# Altium PCB CV2018_LED.PcbDoc
Units mm, origin at the board's own origin, x right, y up, seen from the top; angles counter-clockwise.
Board outline 49.76 x 100 mm, 2 copper layers (TopLayer, BottomLayer); 44 components, 128 nets, 230 pads, 29 vias.
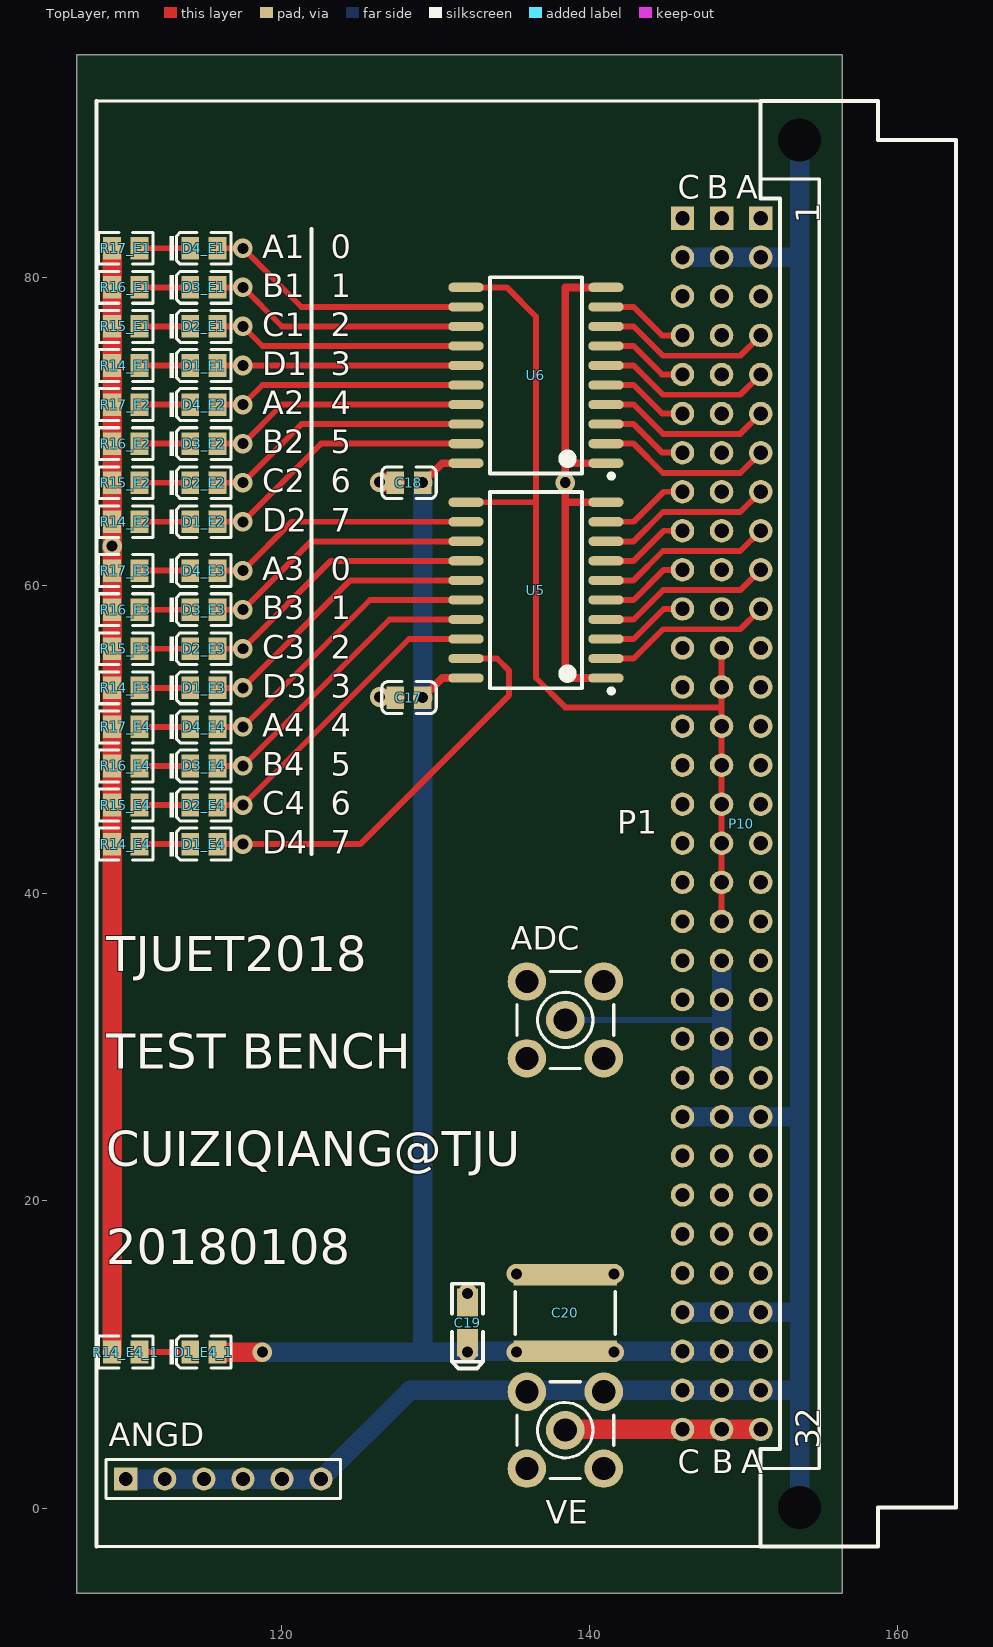
[diagram p0: TopLayer view]
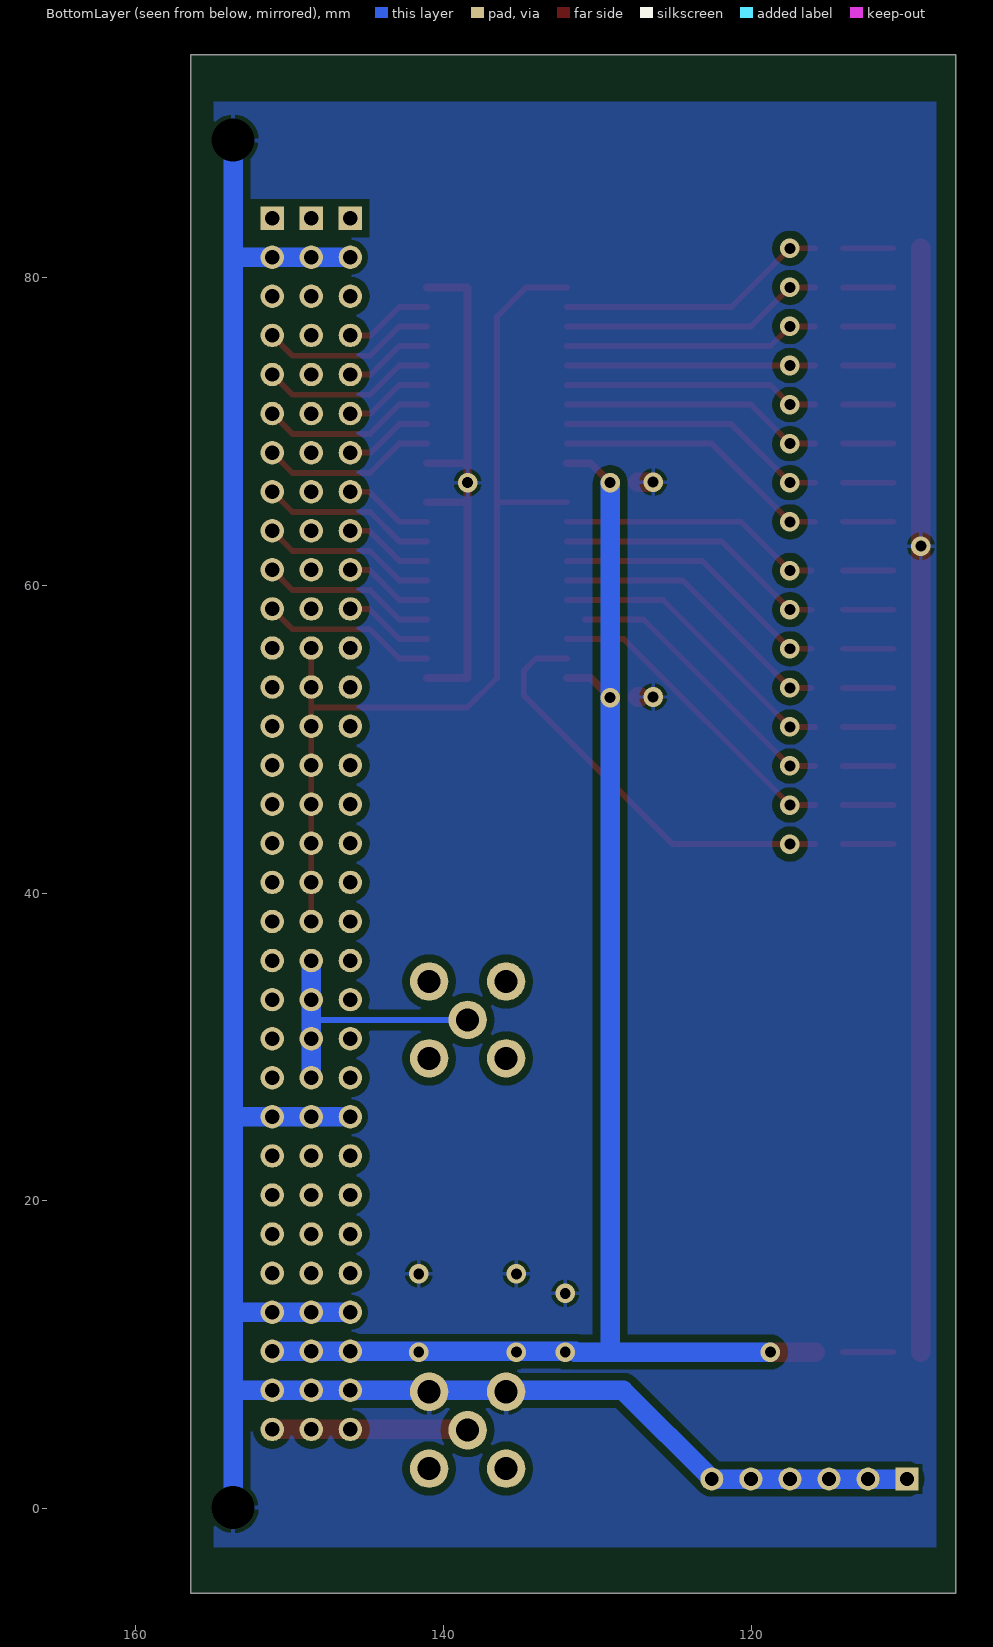
[diagram p1: BottomLayer view, seen from below]
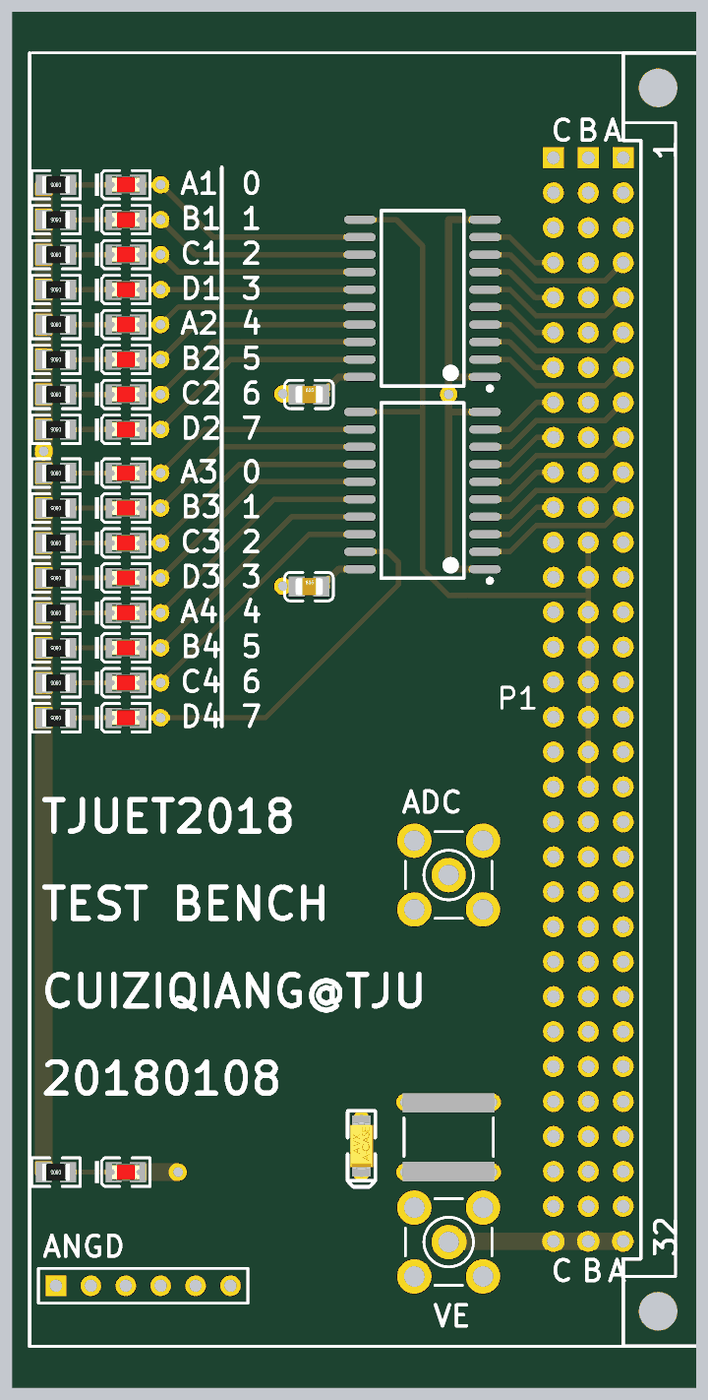
[diagram p2: 3D render of the assembled board from above, using the file's embedded part models]

## Layer stack, top to bottom
TopSolder: solder mask 0.0102, Solder Resist, Dk 3.5
TopLayer: signal copper 0.0356
Dielectric1: core 0.32, FR-4, Dk 4.8
BottomLayer: signal copper 0.0356
BottomSolder: solder mask 0.0102, Solder Resist, Dk 3.5

## Board outline
106.68,-5.512 106.68,94.488 156.439,94.488 156.439,-5.512

## Design rules (kind name [scope] priority, off if disabled: settings)
Clearance [All] p1: gap=0.254
FabricationTestPointUsage TestPointUsage [All] p1: valid=0 allowmultiple=FALSE
FabricationTestpoint Testpoint [All] p1: side=3 testpointundercomponent=TRUE minsize=1.016 maxsize=2.54 preferedsize=1.524 minholesize=0.508 maxholesize=1.016 preferedholesize=0.813 testpointgrid=0.025 allowsidetop=TRUE allowsidebottom=TRUE usegrid=TRUE gridtolerance=0
PlaneClearance [All] p1: clearance=0.254
PolygonConnect [All] p1: connectstyle=Relief reliefconductorwidth=0.254 reliefentries=4 polygonreliefangle="90 Angle" airgapwidth=0.254
RoutingVias [All] p1: holewidth=0.711 width=1.27 viastyle="Through Hole" minholewidth=0.711 minwidth=1.27 maxholewidth=0.711 maxwidth=1.27
SilkToSolderMaskClearance SilkscreenOverComponentPads [IsPad] p1: minsilkscreentomaskgap=0.254 clearancetoexposedcopper=TRUE
SolderMaskExpansion [All] p1: expansion=0.051
Width [All] p1: maxlimit=2.54 minlimit=0.254 preferedwidth=0.381
25 further rules are at their usual default settings.

## Classes and differential pairs
channel class CVx1: E1 E2 E3 E4
net class SWD[1..4]: SWD1 SWD2 SWD3 SWD4
net class SWC[1..4]: SWC1 SWC2 SWC3 SWC4
net class SWB[1..4]: SWB1 SWB2 SWB3 SWB4
net class SWA[1..4]: SWA1 SWA2 SWA3 SWA4
component class E4: D1_E4 D2_E4 D3_E4 D4_E4 R12_E4 R14_E4 R15_E4 R16_E4 R17_E4
component class E3: C1_E3 C2_E3 C3_E3 D1_E3 D2_E3 D3_E3 D4_E3 R2_E3 R6_E3 R12_E3 R14_E3 R15_E3 R16_E3 R17_E3
component class E2: C1_E2 C2_E2 C3_E2 D1_E2 D2_E2 D3_E2 D4_E2 R2_E2 R6_E2 R12_E2 R14_E2 R15_E2 R16_E2 R17_E2
component class E1: C1 C2 C3 C4 C5 C6 C7 C8 C9 C10 C12 C13 D1_E1 D2_E1 D3_E1 D4_E1 R1 R2 R3 R4 R5 R6 R7 R8 R9 R10 R11 R12 R14_E1 R15_E1 R16_E1 R17_E1 U4
component class CVTOP: C17 C18 C19 C20 P10 U5 U6

## Components (designator, comment, footprint, x,y, rotation, side; value= is the part's Value field where it differs from the comment)
ADC "Comment" SMB_V-RJ45 138.43,31.75 r0 top
ANGD "Comment" HDR1X6 109.855,1.905 r0 top
C17 "100nF(104) 10% 50V" LC-0805_C 128.27,52.705 r0 top
C18 "100nF(104) 10% 50V" LC-0805_C 128.27,66.675 r0 top
C19 "10uF (106) ±10% 16V" LC-CASE-A_3216 132.08,12.065 r270 top
C20 "Cap Pol3" C2225 138.43,12.7 r90 top
D1_E1 "红灯 0805" LC-0805_LED_S1 114.935,74.295 r0 top (schematic designator D1)
D1_E2 "红灯 0805" LC-0805_LED_S1 114.935,64.135 r0 top (schematic designator D1)
D1_E3 "红灯 0805" LC-0805_LED_S1 114.935,53.34 r0 top (schematic designator D1)
D1_E4 "红灯 0805" LC-0805_LED_S1 114.935,43.18 r0 top (schematic designator D1)
D1_E4_1 "红灯 0805" LC-0805_LED_S1 114.935,10.16 r0 top (schematic designator D1)
D2_E1 "红灯 0805" LC-0805_LED_S1 114.935,76.835 r0 top (schematic designator D2)
D2_E2 "红灯 0805" LC-0805_LED_S1 114.935,66.675 r0 top (schematic designator D2)
D2_E3 "红灯 0805" LC-0805_LED_S1 114.935,55.88 r0 top (schematic designator D2)
D2_E4 "红灯 0805" LC-0805_LED_S1 114.935,45.72 r0 top (schematic designator D2)
D3_E1 "红灯 0805" LC-0805_LED_S1 114.935,79.375 r0 top (schematic designator D3)
D3_E2 "红灯 0805" LC-0805_LED_S1 114.935,69.215 r0 top (schematic designator D3)
D3_E3 "红灯 0805" LC-0805_LED_S1 114.935,58.42 r0 top (schematic designator D3)
D3_E4 "红灯 0805" LC-0805_LED_S1 114.935,48.26 r0 top (schematic designator D3)
D4_E1 "红灯 0805" LC-0805_LED_S1 114.935,81.915 r0 top (schematic designator D4)
D4_E2 "红灯 0805" LC-0805_LED_S1 114.935,71.755 r0 top (schematic designator D4)
D4_E3 "红灯 0805" LC-0805_LED_S1 114.935,60.96 r0 top (schematic designator D4)
D4_E4 "红灯 0805" LC-0805_LED_S1 114.935,50.8 r0 top (schematic designator D4)
P10 "CNVME96" CNVME96 151.13,83.871 r90 top
R14_E1 "1KΩ (1001) ±1%" LC-0805_R 109.855,74.295 r180 top (schematic designator R14)
R14_E2 "1KΩ (1001) ±1%" LC-0805_R 109.855,64.135 r180 top (schematic designator R14)
R14_E3 "1KΩ (1001) ±1%" LC-0805_R 109.855,53.34 r180 top (schematic designator R14)
R14_E4 "1KΩ (1001) ±1%" LC-0805_R 109.855,43.18 r180 top (schematic designator R14)
R14_E4_1 "1KΩ (1001) ±1%" LC-0805_R 109.855,10.16 r180 top (schematic designator R14)
R15_E1 "1KΩ (1001) ±1%" LC-0805_R 109.855,76.835 r180 top (schematic designator R15)
R15_E2 "1KΩ (1001) ±1%" LC-0805_R 109.855,66.675 r180 top (schematic designator R15)
R15_E3 "1KΩ (1001) ±1%" LC-0805_R 109.855,55.88 r180 top (schematic designator R15)
R15_E4 "1KΩ (1001) ±1%" LC-0805_R 109.855,45.72 r180 top (schematic designator R15)
R16_E1 "1KΩ (1001) ±1%" LC-0805_R 109.855,79.375 r180 top (schematic designator R16)
R16_E2 "1KΩ (1001) ±1%" LC-0805_R 109.855,69.215 r180 top (schematic designator R16)
R16_E3 "1KΩ (1001) ±1%" LC-0805_R 109.855,58.42 r180 top (schematic designator R16)
R16_E4 "1KΩ (1001) ±1%" LC-0805_R 109.855,48.26 r180 top (schematic designator R16)
R17_E1 "1KΩ (1001) ±1%" LC-0805_R 109.855,81.915 r180 top (schematic designator R17)
R17_E2 "1KΩ (1001) ±1%" LC-0805_R 109.855,71.755 r180 top (schematic designator R17)
R17_E3 "1KΩ (1001) ±1%" LC-0805_R 109.855,60.96 r180 top (schematic designator R17)
R17_E4 "1KΩ (1001) ±1%" LC-0805_R 109.855,50.8 r180 top (schematic designator R17)
U5 "74HC573D" LC-SOIC-20_300mil 136.525,59.69 r90 top
U6 "74HC573D" LC-SOIC-20_300mil 136.525,73.66 r90 top
VE "Comment" SMB_V-RJ45 138.43,5.08 r0 top

## Footprints (in the part's own frame and the unit in brackets; to place one, negate y for a bottom-side part, rotate by r counter-clockwise, add the part's x,y. Pads: shape width x height; smd on the part's side, far side on the other; paste and mask are expansions set on the pad)
C2225 [mm] "Chip Capacitor, Body 5.7x6.4mm, IPC High Density"
  rect 1.4x6.7 smd: 1(-2.5,0) 2(2.5,0)
  silkscreen extent -1.4,-3.25 1.4,3.25, body extent -2.95,-3.4 2.95,3.4, height 1.4
CNVME96 [mil]
  round 50 hole 110: 97(200,-100) 98(-3300,-100)
  rect 60x60 / inner round 60 / far side rect 60x60 hole 37: A1(0,0) B1(0,100) C1(0,200)
  round 60 hole 37: A2(-100,0) A3(-200,0) A4(-300,0) A5(-400,0) A6(-500,0) A7(-600,0) A8(-700,0) A9(-800,0) A10(-900,0) A11(-1000,0) A12(-1100,0) A13(-1200,0) A14(-1300,0) A15(-1400,0) A16(-1500,0) A17(-1600,0) A18(-1700,0) A19(-1800,0) A20(-1900,0) A21(-2000,0) A22(-2100,0) A23(-2200,0) A24(-2300,0) A25(-2400,0) A26(-2500,0) A27(-2600,0) A28(-2700,0) A29(-2800,0) A30(-2900,0) A31(-3000,0) A32(-3100,0) B2(-100,100) B3(-200,100) B4(-300,100) B5(-400,100) B6(-500,100) B7(-600,100) B8(-700,100) B9(-800,100) B10(-900,100) B11(-1000,100) B12(-1100,100) B13(-1200,100) B14(-1300,100) B15(-1400,100) B16(-1500,100) B17(-1600,100) B18(-1700,100) B19(-1800,100) B20(-1900,100) B21(-2000,100) B22(-2100,100) B23(-2200,100) B24(-2300,100) B25(-2400,100) B26(-2500,100) B27(-2600,100) B28(-2700,100) B29(-2800,100) B30(-2900,100) B31(-3000,100) B32(-3100,100) C2(-100,200) C3(-200,200) C4(-300,200) C5(-400,200) C6(-500,200) C7(-600,200) C8(-700,200) C9(-800,200) C10(-900,200) C11(-1000,200) C12(-1100,200) C13(-1200,200) C14(-1300,200) C15(-1400,200) C16(-1500,200) C17(-1600,200) C18(-1700,200) C19(-1800,200) C20(-1900,200) C21(-2000,200) C22(-2100,200) C23(-2200,200) C24(-2300,200) C25(-2400,200) C26(-2500,200) C27(-2600,200) C28(-2700,200) C29(-2800,200) C30(-2900,200) C31(-3000,200) C32(-3100,200)
  silkscreen extent -3400,-500 300,0
HDR1X6 [mm] "Connector; Header; 6 Position"
  rect 1.5x1.5 hole 0.9: 1(0,0)
  round 1.5 hole 0.9: 2(2.54,0) 3(5.08,0) 4(7.62,0) 5(10.16,0) 6(12.7,0)
  silkscreen extent -1.27,-1.27 13.97,1.27
LC-0805_C [mm]
  rect 1.16x1.47 smd: 1(-0.89,0) 2(0.89,0)
  silkscreen extent -1.77,-1.04 1.77,1.04, body extent -1,-0.62 1,0.63, height 0.77
LC-0805_LED_S1 [mm]
  rect 1.16x1.47 smd: A(0.89,0) K(-0.89,0)
  silkscreen extent -2.24,-1.04 1.77,1.03, body extent -1.01,-0.62 1.01,0.62, height 1.1
LC-0805_R [mm]
  rect 1.16x1.47 smd: 1(-0.89,0) 2(0.89,0)
  silkscreen extent -1.77,-1.04 1.77,1.03, body extent -1,-0.62 1,0.63, height 0.49
LC-CASE-A_3216 [mm]
  rect 1.8x1.35 smd: 1(1.31,0) 2(-1.31,0)
  silkscreen extent -2.54,-1 2.97,1, body extent -1.7,-0.84 1.7,0.84, height 1.71
LC-SOIC-20_300mil [mm]
  oval 0.6x2.3 smd: 1(-5.715,-4.55) 2(-4.445,-4.55) 3(-3.175,-4.55) 4(-1.905,-4.55) 5(-0.635,-4.55) 6(0.635,-4.55) 7(1.905,-4.55) 8(3.175,-4.55) 9(4.445,-4.55) 10(5.715,-4.55) 11(5.715,4.55) 12(4.445,4.55) 13(3.175,4.55) 14(1.905,4.55) 15(0.635,4.55) 16(-0.635,4.55) 17(-1.905,4.55) 18(-3.175,4.55) 19(-4.445,4.55) 20(-5.715,4.55)
  silkscreen extent -6.7,-5.05 6.38,3
SMB_V-RJ45 [mm] "Connector; SMB Straight"
  round 2.5 hole 1.5: 1(0,0) 2(-2.5,-2.5) 2(-2.5,2.5) 2(2.5,-2.5) 2(2.5,2.5)
  silkscreen extent -3.15,-3.15 3.15,3.15

## Part data
ADC VE: library part SMB
ANGD: library part "Header 6"
C17 C18: library part "0805 100nF(104) 10% 50V", "贴片电容"
C19: library part "3216 10uF (106) 10% 16V", "钽电容"
C20: "Polarized Capacitor (Surface Mount)"
D1_E1 D1_E2 D1_E3 D1_E4 D1_E4_1 D2_E1 D2_E2 D2_E3 D2_E4 D3_E1 D3_E2 D3_E3 D3_E4 D4_E1 D4_E2 D4_E3 D4_E4: library part "0805 红灯", "发光二极管"
P10: "96-Pin Connector (3x32 2.54mm grid)"
R14_E1 R14_E2 R14_E3 R14_E4 R14_E4_1 R15_E1 R15_E2 R15_E3 R15_E4 R16_E1 R16_E2 R16_E3 R16_E4 R17_E1 R17_E2 R17_E3 R17_E4: library part "0805 1KΩ (1001) 1%", "贴片电阻"
U5 U6: "74系列逻辑芯片"

## Via types
v1: diameter 1.27, hole 0.711, TopLayer to BottomLayer, 29 vias

## Nets (pads, with @x,y where several pads share a name; then routed paths per layer and width w, separated by ;. In a path a pad name is that pad's centre, name@x,y a point inside that pad or via, vN(x,y) a via of type N, cw(c..) or ccw(c..) an arc to the next point about the centre after c; other vN are vias at no path point)
+5V: C17.2 C18.2 C19.1 C20.1 D1_E4_1.A P10.A30 P10.B30 P10.C30 U5.20 U6.20 | length 98.5
  TopLayer w0.508: v1(129.16,52.705) 130.43,53.975 U5.20 ; v1(129.16,66.675) 130.43,67.945 U6.20
  TopLayer w1.27: D1_E4_1.A v1(118.745,10.16)
  BottomLayer w1.27: v1(118.745,10.16) 129.16,10.16 ; v1(129.16,66.675) v1(129.16,52.705) 129.16,10.16 ; v1@131.445,10.16 129.16,10.16 ; 131.445,10.211 P10.C30 P10.B30 P10.A30
  other v1: 132.08,10.16 135.255,10.16 141.605,10.16
+12V: P10.A1 P10.B1 P10.C1
-12V: P10.A3 P10.B3 P10.C3
A0: P10.C12
A1: P10.A12
A2: P10.C13
A3: P10.A13
A4: P10.C14
A5: P10.A14
A6: P10.C15
A7: P10.A15
A8: P10.C16
A9: P10.A16
A10: P10.C17
A11: P10.A17
A12: P10.C18
A13: P10.A18
A14: P10.C19
A15: P10.A19
AGND: ANGD.1 ANGD.2 ANGD.3 ANGD.4 ANGD.5 ANGD.6 C17.1 C18.1 C19.2 C20.2 P10.97 P10.98 P10.A2 P10.A24 P10.A29 P10.A31 P10.B2 P10.B24 P10.B29 P10.B31 P10.C2 P10.C24 P10.C29 P10.C31 R14_E1.2 R14_E2.2 R14_E3.2 R14_E4.2 R14_E4_1.2 R15_E1.2 R15_E2.2 R15_E3.2 R15_E4.2 R16_E1.2 R16_E2.2 R16_E3.2 R16_E4.2 R17_E1.2 R17_E2.2 R17_E3.2 R17_E4.2 U5.1 U5.10 U6.1 U6.10 VE.2@135.93,7.58 VE.2@140.93,7.58 | length 266.8
  TopLayer w0.508: 138.43,65.405 U5.10 ; 138.43,67.945 U6.1 ; U5.1 138.43,53.975 138.43,63.5 138.43,79.375 U6.10
  TopLayer w1.27: R14_E4_1.2 R15_E4.2 R16_E4.2 R17_E4.2 R14_E3.2 R15_E3.2 R17_E3.2 R14_E2.2 R15_E2.2 R16_E2.2 R17_E2.2 R14_E1.2 R16_E1.2 R17_E1.2 ; v1(126.365,66.715) C18.1@127.38,66.715 ; C17.1@127.254,52.745 C17.1@127.38,52.745
  BottomLayer w1.27: ANGD.1 ANGD.6 128.321,7.671 P10.B31 P10.A31 153.619,7.671 ; P10.C29 P10.B29 P10.A29 153.619,12.751 ; P10.C24 P10.B24 P10.A24 153.619,25.451 153.67,25.4 ; P10.C2 P10.B2 P10.A2 153.619,81.331 153.67,81.28 ; P10.98 153.67,25.4 ; P10.97 153.67,81.28 ; 153.67,25.4 153.67,81.28
  other v1: 132.08,13.97 135.255,15.24 141.605,15.24 126.365,52.745 108.965,62.547 138.43,66.675
CLK: P10.B12 P10.B13 P10.B14 P10.B15 P10.B16 P10.B17 P10.B18 P10.B19 U5.11 U6.11 | length 64
  TopLayer w0.381: U5.11 136.525,65.405 ; U6.11 134.62,79.375 136.525,77.47 136.525,65.405 ; P10.B19 P10.B18 P10.B17 P10.B16 P10.B15 P10.B14 148.59,52.07 ; P10.B12 P10.B13 148.59,52.07 ; 136.525,65.405 136.525,53.975 138.43,52.07 148.59,52.07
D0: P10.C4 U6.9 | length 5.7
  TopLayer w0.381: U6.9 142.875,78.105 144.729,76.251 P10.C4
D1: P10.A4 U6.8 | length 11.4
  TopLayer w0.381: U6.8 142.875,76.835 144.78,74.93 149.809,74.93 P10.A4
D2: P10.C5 U6.7 | length 5.7
  TopLayer w0.381: U6.7 142.875,75.565 144.729,73.711 P10.C5
D3: P10.A5 U6.6 | length 11.4
  TopLayer w0.381: U6.6 142.875,74.295 144.78,72.39 149.809,72.39 P10.A5
D4: P10.C6 U6.5 | length 5.7
  TopLayer w0.381: U6.5 142.875,73.025 144.729,71.171 P10.C6
D5: P10.A6 U6.4 | length 11.4
  TopLayer w0.381: U6.4 142.875,71.755 144.78,69.85 149.809,69.85 P10.A6
D6: P10.C7 U6.3 | length 5.7
  TopLayer w0.381: U6.3 142.875,70.485 144.729,68.631 P10.C7
D7: P10.A7 U6.2 | length 11.4
  TopLayer w0.381: U6.2 142.875,69.215 144.78,67.31 149.809,67.31 P10.A7
D8: P10.C8 U5.9 | length 5.8
  TopLayer w0.381: U5.9 142.875,64.135 144.831,66.091 P10.C8
D9: P10.A8 U5.8 | length 11.4
  TopLayer w0.381: U5.8 142.875,62.865 144.78,64.77 149.809,64.77 P10.A8
D10: P10.C9 U5.7 | length 5.8
  TopLayer w0.381: U5.7 142.875,61.595 144.831,63.551 P10.C9
D11: P10.A9 U5.6 | length 11.4
  TopLayer w0.381: U5.6 142.875,60.325 144.78,62.23 149.809,62.23 P10.A9
D12: P10.C10 U5.5 | length 5.8
  TopLayer w0.381: U5.5 142.875,59.055 144.831,61.011 P10.C10
D13: P10.A10 U5.4 | length 11.4
  TopLayer w0.381: U5.4 142.875,57.785 144.78,59.69 149.809,59.69 P10.A10
D14: P10.C11 U5.3 | length 5.8
  TopLayer w0.381: U5.3 142.875,56.515 144.831,58.471 P10.C11
D15: P10.A11 U5.2 | length 11.4
  TopLayer w0.381: U5.2 142.875,55.245 144.78,57.15 149.809,57.15 P10.A11
NetC11_E1_1: 
NetC11_E1_2: 
NetC11_E2_1: 
NetC11_E2_2: 
NetC11_E3_1: 
NetC11_E3_2: 
NetC11_E4_1: 
NetC11_E4_2: 
NetC12_E1_2: 
NetC12_E2_2: 
NetC12_E3_2: 
NetC12_E4_2: 
NetC13_E1_2: 
NetC13_E2_2: 
NetC13_E3_2: 
NetC13_E4_2: 
NetD1_E1_K: D1_E1.K R14_E1.1 | length 3.3
  TopLayer w0.381: R14_E1.1 D1_E1.K
NetD1_E2_K: D1_E2.K R14_E2.1 | length 3.3
  TopLayer w0.381: R14_E2.1 D1_E2.K
NetD1_E3_K: D1_E3.K R14_E3.1 | length 3.3
  TopLayer w0.381: R14_E3.1 D1_E3.K
NetD1_E4_K: D1_E4.K R14_E4.1 | length 3.3
  TopLayer w0.381: R14_E4.1 D1_E4.K
NetD2_E1_K: D2_E1.K R15_E1.1 | length 3.3
  TopLayer w0.381: R15_E1.1 D2_E1.K
NetD2_E2_K: D2_E2.K R15_E2.1 | length 3.3
  TopLayer w0.381: R15_E2.1 D2_E2.K
NetD2_E3_K: D2_E3.K R15_E3.1 | length 3.3
  TopLayer w0.381: R15_E3.1 D2_E3.K
NetD2_E4_K: D2_E4.K R15_E4.1 | length 3.3
  TopLayer w0.381: R15_E4.1 D2_E4.K
NetD3_E1_K: D3_E1.K R16_E1.1 | length 3.3
  TopLayer w0.381: R16_E1.1 D3_E1.K
NetD3_E2_K: D3_E2.K R16_E2.1 | length 3.3
  TopLayer w0.381: R16_E2.1 D3_E2.K
NetD3_E3_K: D3_E3.K R16_E3.1 | length 3.3
  TopLayer w0.381: R16_E3.1 D3_E3.K
NetD3_E4_K: D3_E4.K R16_E4.1 | length 3.3
  TopLayer w0.381: R16_E4.1 D3_E4.K
NetD4_E1_K: D4_E1.K R17_E1.1 | length 3.3
  TopLayer w0.381: R17_E1.1 D4_E1.K
NetD4_E2_K: D4_E2.K R17_E2.1 | length 3.3
  TopLayer w0.381: R17_E2.1 D4_E2.K
NetD4_E3_K: D4_E3.K R17_E3.1 | length 3.3
  TopLayer w0.381: R17_E3.1 D4_E3.K
NetD4_E4_K: D4_E4.K R17_E4.1 | length 3.3
  TopLayer w0.381: R17_E4.1 D4_E4.K
NetP1_E1_1: 
NetP1_E2_1: 
NetP1_E3_1: 
NetP1_E4_1: 
NetP10_B20: ADC.1 P10.B20 P10.B21 P10.B22 P10.B23 | length 17.8
  BottomLayer w0.381: ADC.1 148.59,31.75
  BottomLayer w1.27: P10.B23 P10.B22 P10.B21 P10.B20
NetR3_E1_1: 
NetR3_E2_1: 
NetR3_E3_1: 
NetR3_E4_1: 
NetR5_E1_2: 
NetR5_E2_2: 
NetR5_E3_2: 
NetR5_E4_2: 
NetR6_E1_1: 
NetR6_E2_1: 
NetR6_E3_1: 
NetR6_E4_1: 
NetR8_E1_2: 
NetR8_E2_2: 
NetR8_E3_2: 
NetR8_E4_2: 
NetR9_E1_2: 
NetR9_E2_2: 
NetR9_E3_2: 
NetR9_E4_2: 
NetR10_E1_1: 
NetR10_E2_1: 
NetR10_E3_1: 
NetR10_E4_1: 
NetR12_E1_2: 
NetR12_E2_2: 
NetR12_E3_2: 
NetR12_E4_2: 
NetU1_E1_3: 
NetU1_E2_3: 
NetU1_E3_3: 
NetU1_E4_3: 
NetU4_E1_3: 
NetU4_E2_3: 
NetU4_E3_3: 
NetU4_E4_3: 
SWA1: D4_E1.A U6.12 | length 17.7
  TopLayer w0.381: D4_E1.A v1(117.475,81.915) 121.285,78.105 U6.12
SWA2: D4_E2.A U6.16 | length 16.7
  TopLayer w0.381: D4_E2.A v1(117.475,71.755) 118.745,73.025 U6.16
SWA3: D4_E3.A U5.12 | length 17.2
  TopLayer w0.381: D4_E3.A@116.08,60.96 v1(117.475,60.96) 120.65,64.135 U5.12
SWA4: D4_E4.A U5.16 | length 19.6
  TopLayer w0.381: D4_E4.A v1(117.475,50.8) 125.73,59.055 U5.16
SWB1: D3_E1.A U6.13 | length 17.2
  TopLayer w0.381: D3_E1.A v1(117.475,79.375) 120.015,76.835 U6.13
SWB2: D3_E2.A U6.17 | length 17.2
  TopLayer w0.381: D3_E2.A v1(117.475,69.215) 120.015,71.755 U6.17
SWB3: D3_E3.A U5.13 | length 17.7
  TopLayer w0.381: D3_E3.A@116.08,58.42 v1(117.475,58.42) 121.92,62.865 U5.13
SWB4: D3_E4.A U5.17 | length 18.9
  TopLayer w0.381: D3_E4.A v1(117.475,48.26) 127,57.785 130.81,57.785
SWC1: D2_E1.A U6.14 | length 16.7
  TopLayer w0.381: D2_E1.A v1(117.475,76.835) 118.745,75.565 U6.14
SWC2: D2_E2.A U6.18 | length 17.7
  TopLayer w0.381: D2_E2.A v1(117.475,66.675) 121.285,70.485 U6.18
SWC3: D2_E3.A U5.14 | length 18.3
  TopLayer w0.381: D2_E3.A@116.08,55.88 v1(117.475,55.88) 123.19,61.595 U5.14
SWC4: D2_E4.A U5.18 | length 20.6
  TopLayer w0.381: D2_E4.A v1(117.475,45.72) 128.27,56.515 U5.18
SWD1: D1_E1.A U6.15 | length 16.1
  TopLayer w0.381: D1_E1.A v1(117.475,74.295) U6.15
SWD2: D1_E2.A U6.19 | length 18.3
  TopLayer w0.381: D1_E2.A v1(117.475,64.135) 122.555,69.215 U6.19
SWD3: D1_E3.A U5.15 | length 18.8
  TopLayer w0.381: D1_E3.A@116.08,53.34 v1(117.475,53.34) 124.46,60.325 U5.15
SWD4: D1_E4.A U5.19 | length 27.7
  TopLayer w0.381: D1_E4.A 125.095,43.18 134.779,52.864 134.779,54.451 133.985,55.245 U5.19
  other v1: 117.475,43.18
VE: P10.A32 P10.B32 P10.C32 VE.1 | length 12.7
  TopLayer w1.27: VE.1@138.43,5.131 P10.C32 P10.B32 P10.A32
VO: 
pads on no net: ADC.2 D1_E4_1.K P10.A20 P10.A21 P10.A22 P10.A23 P10.A25 P10.A26 P10.A27 P10.A28 P10.B4 P10.B5 P10.B6 P10.B7 P10.B8 P10.B9 P10.B10 P10.B11 P10.B25 P10.B26 P10.B27 P10.B28 P10.C20 P10.C21 P10.C22 P10.C23 P10.C25 P10.C26 P10.C27 P10.C28 R14_E4_1.1 VE.2@135.93,2.58 VE.2@140.93,2.58
copper on no net: | length 3.3
  TopLayer w0.381: 110.745,10.16 114.045,10.16

## Polygon pours and split planes (outlines as drawn)
AGND on BottomLayer "GND" (solid, remove dead copper, pour order 3): 107.95,91.44 107.95,-2.54 154.94,-2.54 154.94,91.44

## Silkscreen, mask and mechanical layers (free items; w line width, h text height)
TopOverlay:
  lines w0.203: 107.95,-2.489 151.13,-2.489 151.13,2.591 154.94,2.591 154.94,86.411 151.13,86.411 151.13,91.491 107.95,91.491
  lines w0.254: 107.95,-2.489 107.95,91.491 ; 121.92,42.545 121.92,83.185
  text "A1" at 118.745,81.28 h1.52
  text "0" at 123.19,81.28 h1.52
  text "B1" at 118.745,78.74 h1.52
  text "1" at 123.19,78.74 h1.52
  text "C1" at 118.745,76.2 h1.52
  text "2" at 123.19,76.2 h1.52
  text "D1" at 118.745,73.66 h1.52
  text "3" at 123.19,73.66 h1.52
  text "A2" at 118.745,71.12 h1.52
  text "4" at 123.19,71.12 h1.52
  text "B2" at 118.745,68.58 h1.52
  text "5" at 123.19,68.58 h1.52
  text "C2" at 118.745,66.04 h1.52
  text "6" at 123.19,66.04 h1.52
  text "D2" at 118.745,63.5 h1.52
  text "7" at 123.19,63.5 h1.52
  text "A3" at 118.745,60.325 h1.52
  text "0" at 123.19,60.325 h1.52
  text "B3" at 118.745,57.785 h1.52
  text "1" at 123.19,57.785 h1.52
  text "C3" at 118.745,55.245 h1.52
  text "2" at 123.19,55.245 h1.52
  text "D3" at 118.745,52.705 h1.52
  text "3" at 123.19,52.705 h1.52
  text "A4" at 118.745,50.165 h1.52
  text "4" at 123.19,50.165 h1.52
  text "B4" at 118.745,47.625 h1.52
  text "5" at 123.19,47.625 h1.52
  text "C4" at 118.745,45.085 h1.52
  text "6" at 123.19,45.085 h1.52
  text "P1" at 141.817,43.866 h1.52
  text "D4" at 118.745,42.545 h1.52
  text "7" at 123.19,42.545 h1.52
  text "TJUET2018" at 108.585,34.925 h2.29
  text "TEST BENCH" at 108.585,28.575 h2.29
  text "CUIZIQIANG@TJU" at 108.585,22.225 h2.29
  text "20180108" at 108.585,15.875 h2.29
Mechanical1:
  the board outline again, w0.508

## Text inside footprints (layer, text, board x,y; h text height)
P10: TopOverlay "C" at 145.732,85.141 h1.52; TopOverlay "B" at 147.637,85.141 h1.52; TopOverlay "A" at 149.542,85.141 h1.52; TopOverlay "C" at 145.732,2.273 h1.52; TopOverlay "B" at 147.955,2.273 h1.52; TopOverlay "A" at 149.86,2.273 h1.52; TopOverlay "32" at 154.94,3.861 h1.52 r90; TopOverlay "1" at 154.94,83.553 h1.52 r90